# Altium PCB Board1V2.PcbDoc
Units mil, origin at the board's own origin, x right, y up, seen from the top; angles counter-clockwise.
Board outline 3465 x 3690 mil, 2 copper layers (Top Layer, Bottom Layer); 49 components, 29 nets, 284 pads, 66 vias.
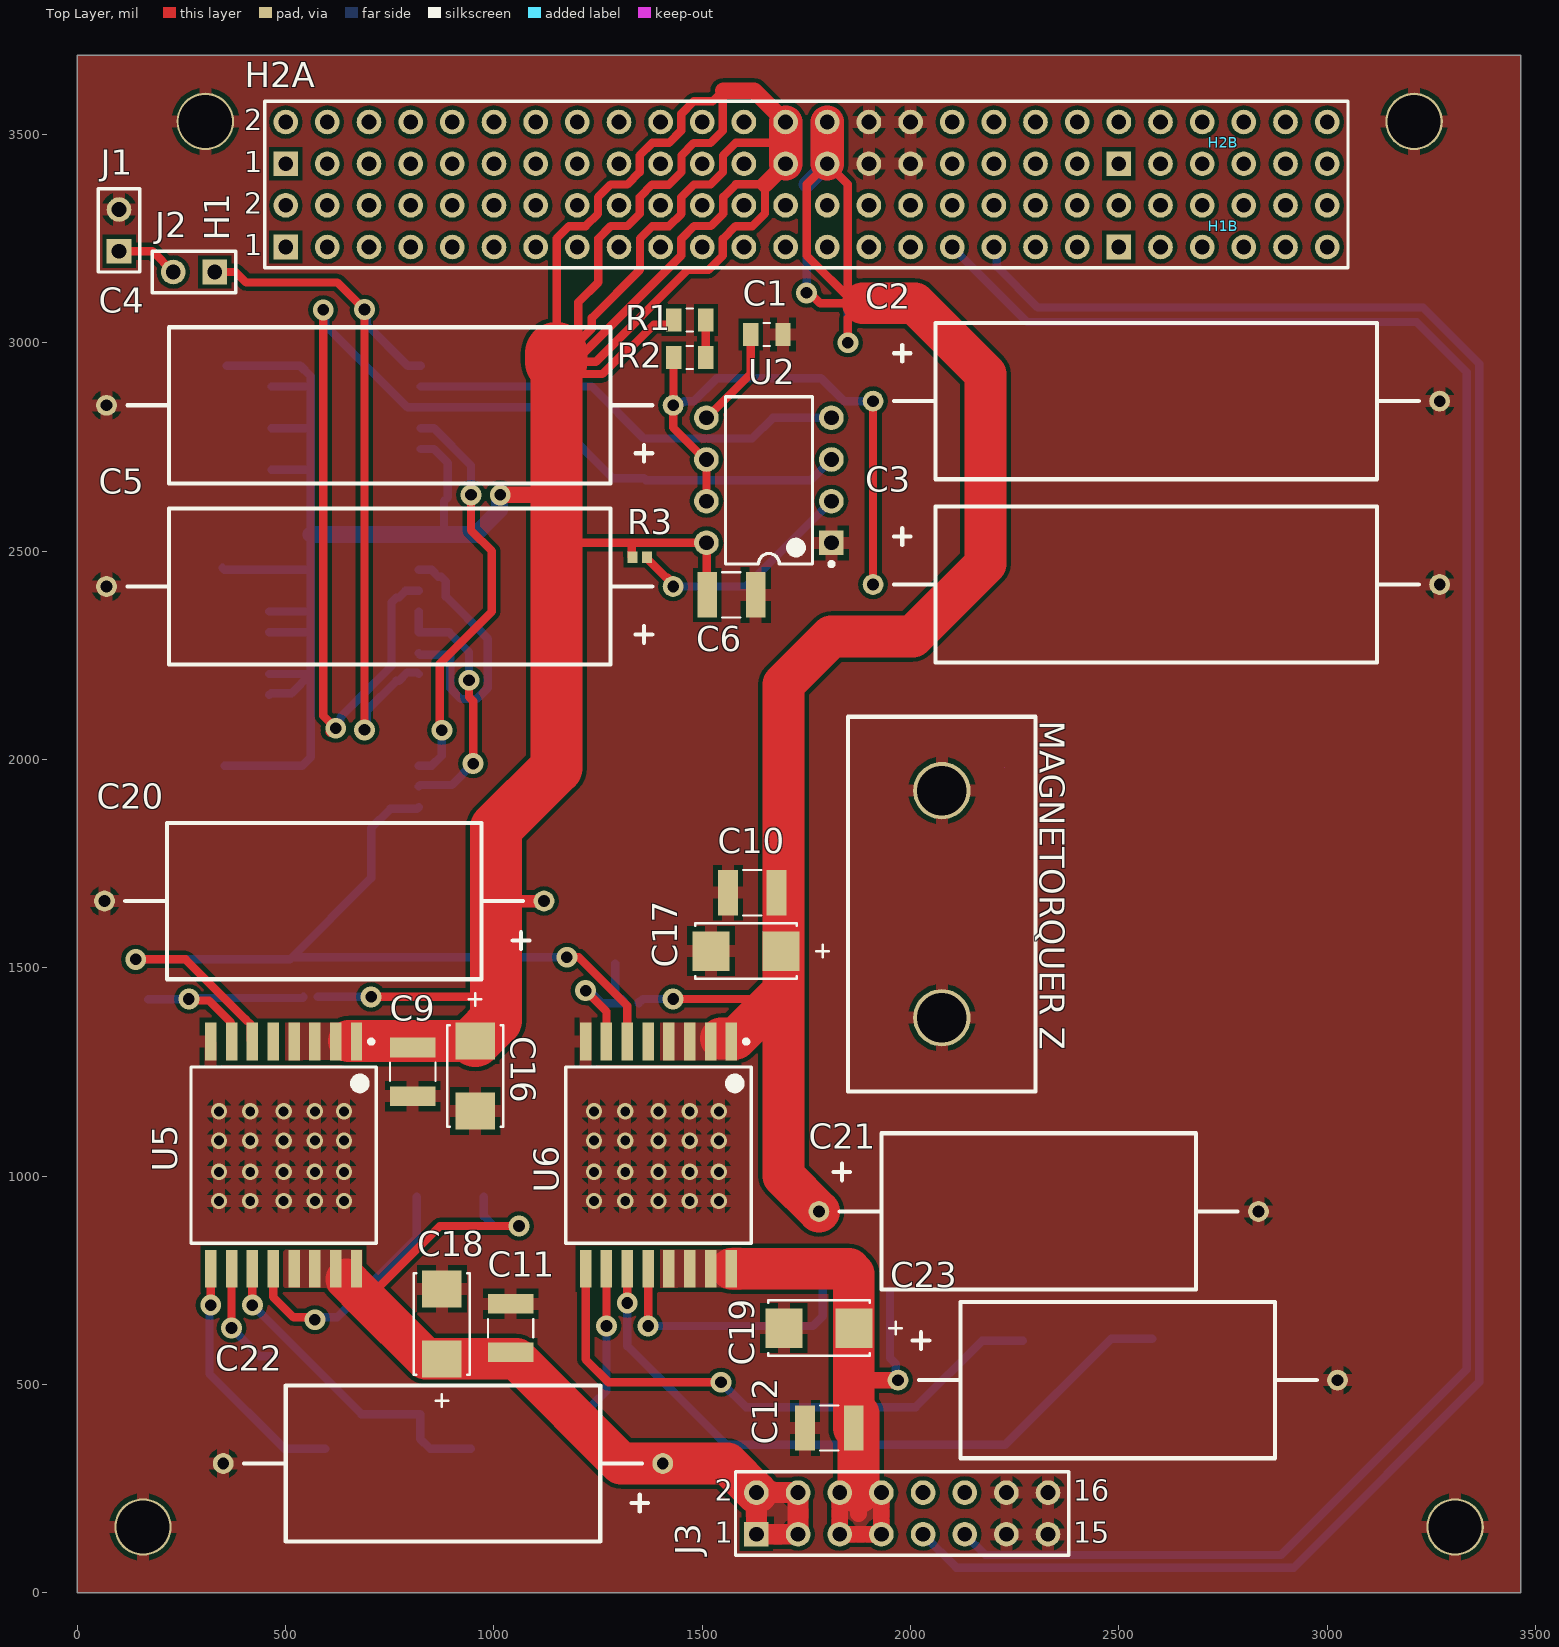
[diagram p0: Top Layer view]
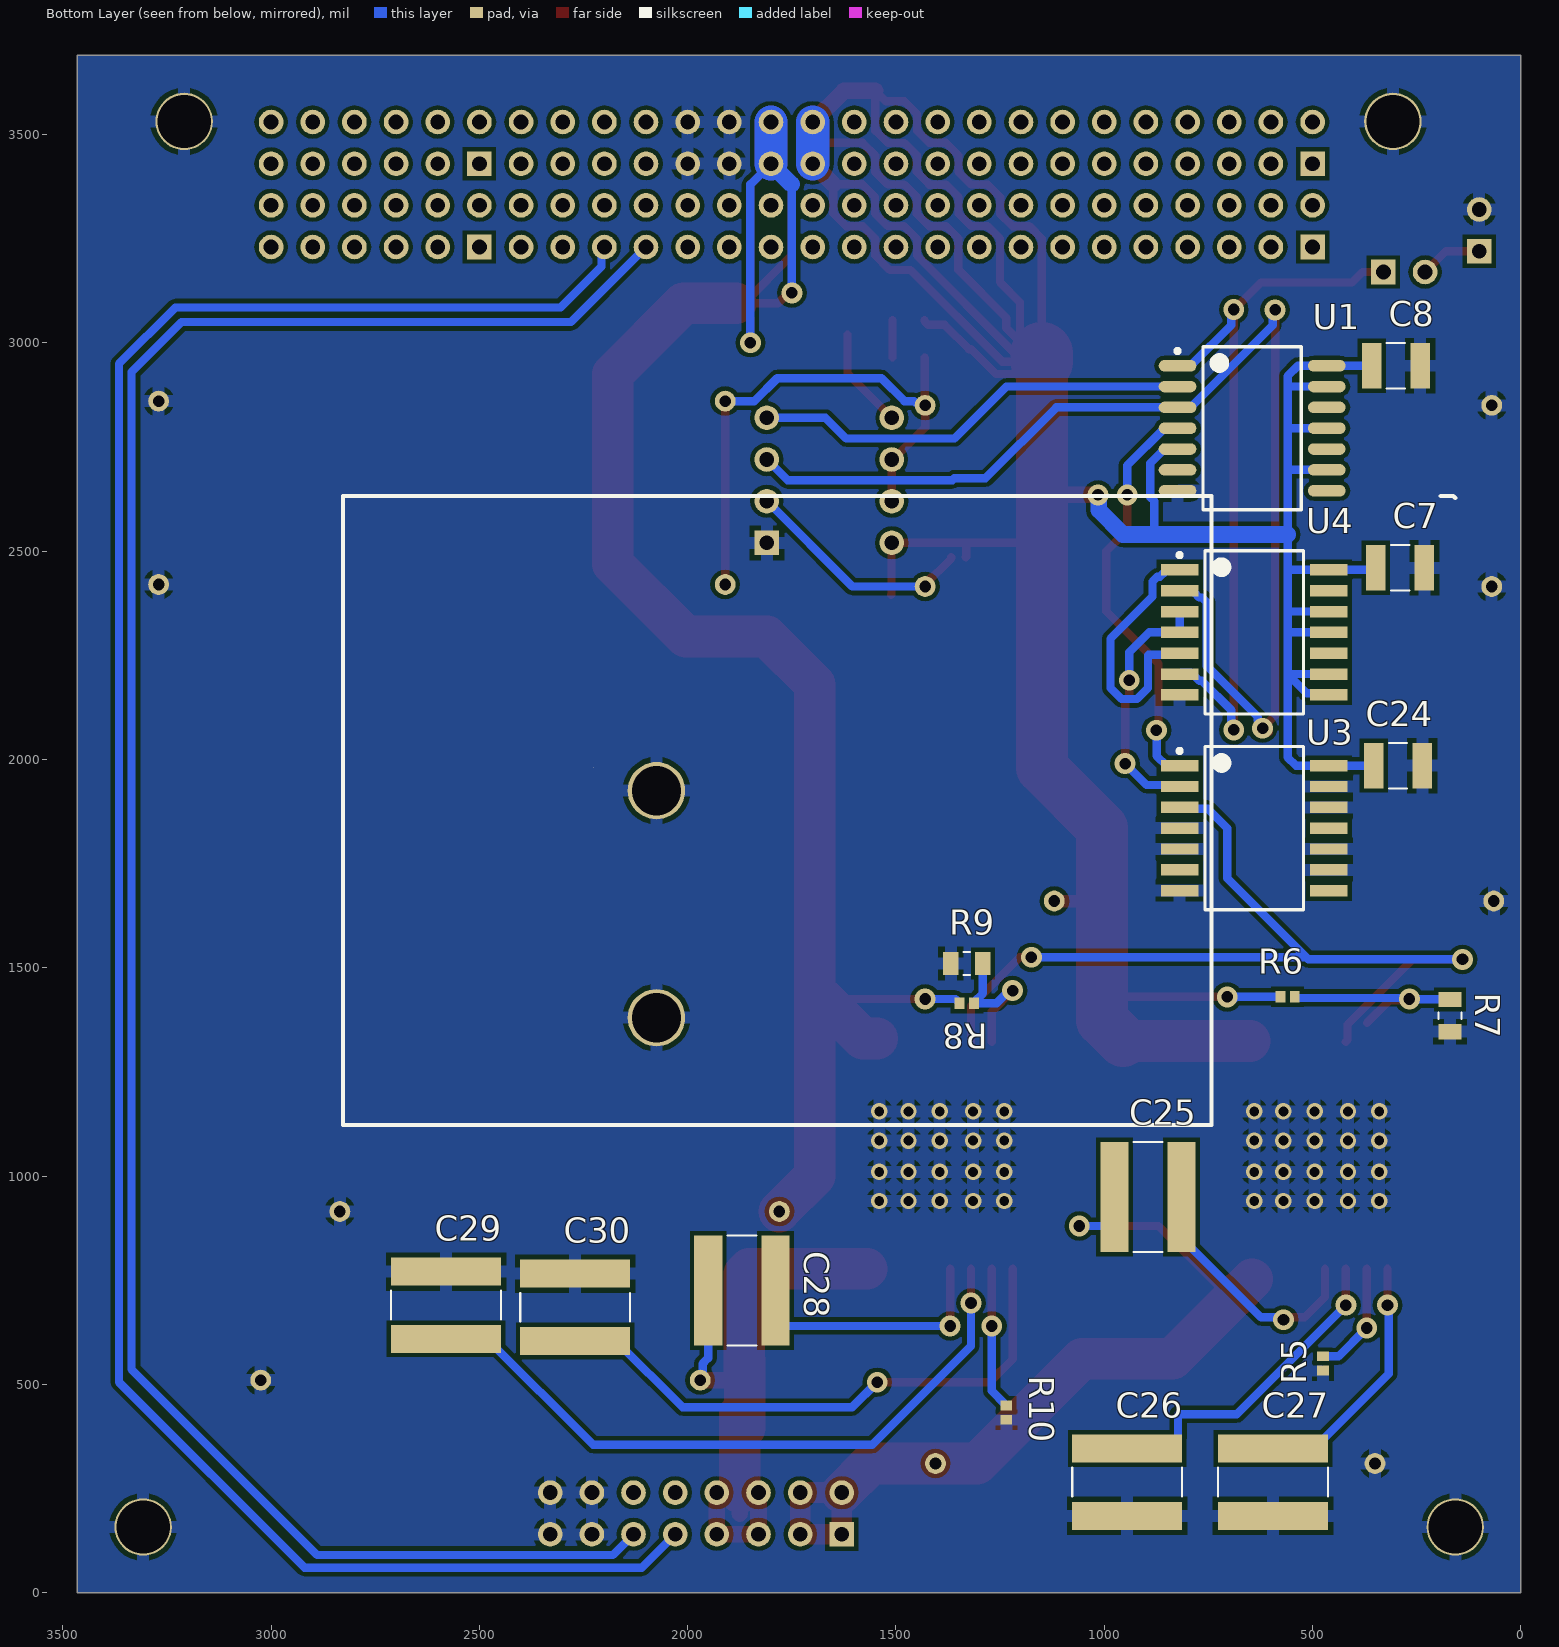
[diagram p1: Bottom Layer view, seen from below]

## Layer stack, top to bottom
Top Solder: solder mask 0.4, Solder Resist, Dk 3.5
Top Layer: signal copper 1.4
Dielectric 1: dielectric 12.6, FR-4, Dk 4.8
Bottom Layer: signal copper 1.4
Bottom Solder: solder mask 0.4, Solder Resist, Dk 3.5

## Board outline
0,0 3465,0 3465,3690 0,3690
cut-out: 2225,1980

## Design rules (kind name [scope] priority, off if disabled: settings)
Clearance Clearance_7 [InNamedPolygon('5vload')] p1: gap=10 ignorepadtopadclearanceinfootprint=FALSE except(0: Arc-Hole Track-Hole SMDPad-Hole THPad-Hole Via-Hole Fill-Hole Poly-Hole Region-Hole Text-Hole)
Clearance Clearance_6 [InNamedPolygon('5vload')] p2: gap=5 ignorepadtopadclearanceinfootprint=FALSE
Clearance Clearance_5 [InNamedPolygon('5vload')] p3: gap=10 ignorepadtopadclearanceinfootprint=TRUE
Clearance Clearance_4 [InNamedPolygon('5vload')] p4: gap=0 ignorepadtopadclearanceinfootprint=FALSE
Clearance Clearance_3 [InNamedPolygon('5vload')] p5: gap=10 ignorepadtopadclearanceinfootprint=FALSE except(0: Arc-Hole Track-Hole SMDPad-Hole THPad-Hole Via-Hole Fill-Hole Poly-Hole Region-Hole Text-Hole)
Clearance Clearance_2 [InNamedPolygon('5vload')] p6: gap=0 ignorepadtopadclearanceinfootprint=FALSE
Clearance Clearance_1 [InNamedPolygon('5VLOADTOP2')] p7: gap=10 ignorepadtopadclearanceinfootprint=FALSE
Clearance [All] p8: gap=10 ignorepadtopadclearanceinfootprint=FALSE except(0: Arc-Hole Track-Hole SMDPad-Hole THPad-Hole Via-Hole Fill-Hole Poly-Hole Region-Hole Text-Hole)
PolygonConnect PolygonConnect_19 [All vs IsNamedPolygon('NONET_L-01_P-001')] p1: thpad.connectstyle=Relief thpad.reliefconductorwidth=40 thpad.reliefentries=4 thpad.polygonreliefangle="90 Angle" thpad.airgapwidth=12 smdpad.connectstyle=Relief smdpad.reliefconductorwidth=10 smdpad.reliefentries=4 smdpad.polygonreliefangle="90 Angle" smdpad.airgapwidth=10 via.connectstyle=Relief via.reliefconductorwidth=10 via.reliefentries=4 via.polygonreliefangle="90 Angle" via.airgapwidth=10
PolygonConnect PolygonConnect_18 [All vs IsNamedPolygon('NONET_L-01_P-001')] p2: thpad.connectstyle=Relief thpad.reliefconductorwidth=50 thpad.reliefentries=4 thpad.polygonreliefangle="90 Angle" thpad.airgapwidth=12 smdpad.connectstyle=Relief smdpad.reliefconductorwidth=10 smdpad.reliefentries=4 smdpad.polygonreliefangle="90 Angle" smdpad.airgapwidth=10 via.connectstyle=Relief via.reliefconductorwidth=10 via.reliefentries=4 via.polygonreliefangle="90 Angle" via.airgapwidth=10
PolygonConnect PolygonConnect_17 [All vs IsNamedPolygon('NONET_L-01_P-001')] p3: connectstyle=Direct reliefconductorwidth=10 reliefentries=4 polygonreliefangle="90 Angle" airgapwidth=10
PolygonConnect PolygonConnect_16 [All vs IsNamedPolygon('NONET_L-01_P-001')] p4: thpad.connectstyle=Relief thpad.reliefconductorwidth=40 thpad.reliefentries=4 thpad.polygonreliefangle="90 Angle" thpad.airgapwidth=12 smdpad.connectstyle=Relief smdpad.reliefconductorwidth=10 smdpad.reliefentries=4 smdpad.polygonreliefangle="90 Angle" smdpad.airgapwidth=10 via.connectstyle=Relief via.reliefconductorwidth=10 via.reliefentries=4 via.polygonreliefangle="90 Angle" via.airgapwidth=10
PolygonConnect PolygonConnect_15 [All vs IsNamedPolygon('5vload')] p5: thpad.connectstyle=Relief thpad.reliefconductorwidth=40 thpad.reliefentries=4 thpad.polygonreliefangle="90 Angle" thpad.airgapwidth=12 smdpad.connectstyle=Relief smdpad.reliefconductorwidth=10 smdpad.reliefentries=4 smdpad.polygonreliefangle="90 Angle" smdpad.airgapwidth=10 via.connectstyle=Relief via.reliefconductorwidth=10 via.reliefentries=4 via.polygonreliefangle="90 Angle" via.airgapwidth=10
PolygonConnect PolygonConnect_14 [All vs IsNamedPolygon('5vload')] p6: connectstyle=Relief reliefconductorwidth=49 reliefentries=4 polygonreliefangle="90 Angle" airgapwidth=12
PolygonConnect PolygonConnect_13 [All vs IsNamedPolygon('5VLOADTOP2')] p7: connectstyle=Relief reliefconductorwidth=40 reliefentries=4 polygonreliefangle="90 Angle" airgapwidth=12
PolygonConnect PolygonConnect_12 [All vs IsNamedPolygon('5VLOADTOP2')] p8: thpad.connectstyle=Relief thpad.reliefconductorwidth=40 thpad.reliefentries=4 thpad.polygonreliefangle="90 Angle" thpad.airgapwidth=12 smdpad.connectstyle=Relief smdpad.reliefconductorwidth=10 smdpad.reliefentries=4 smdpad.polygonreliefangle="90 Angle" smdpad.airgapwidth=10 via.connectstyle=Relief via.reliefconductorwidth=10 via.reliefentries=4 via.polygonreliefangle="90 Angle" via.airgapwidth=10
PolygonConnect PolygonConnect_11 [All vs IsNamedPolygon('GNDBOT')] p9: connectstyle=Relief reliefconductorwidth=30 reliefentries=4 polygonreliefangle="90 Angle" airgapwidth=12
PolygonConnect PolygonConnect_10 [All vs IsNamedPolygon('3V3LOADTOP')] p10: thpad.connectstyle=Relief thpad.reliefconductorwidth=10 thpad.reliefentries=4 thpad.polygonreliefangle="90 Angle" thpad.airgapwidth=10 smdpad.connectstyle=Direct smdpad.reliefconductorwidth=10 smdpad.reliefentries=4 smdpad.polygonreliefangle="90 Angle" smdpad.airgapwidth=10 via.connectstyle=Relief via.reliefconductorwidth=10 via.reliefentries=4 via.polygonreliefangle="90 Angle" via.airgapwidth=10
PolygonConnect PolygonConnect_9 [All vs IsNamedPolygon('3V3TPOP')] p11: thpad.connectstyle=Relief thpad.reliefconductorwidth=10 thpad.reliefentries=4 thpad.polygonreliefangle="90 Angle" thpad.airgapwidth=10 smdpad.connectstyle=Direct smdpad.reliefconductorwidth=10 smdpad.reliefentries=4 smdpad.polygonreliefangle="90 Angle" smdpad.airgapwidth=10 via.connectstyle=Relief via.reliefconductorwidth=10 via.reliefentries=4 via.polygonreliefangle="90 Angle" via.airgapwidth=10
PolygonConnect PolygonConnect_8 [All vs IsNamedPolygon('5VLOADTOP')] p12: thpad.connectstyle=Relief thpad.reliefconductorwidth=10 thpad.reliefentries=4 thpad.polygonreliefangle="90 Angle" thpad.airgapwidth=10 smdpad.connectstyle=Direct smdpad.reliefconductorwidth=10 smdpad.reliefentries=4 smdpad.polygonreliefangle="90 Angle" smdpad.airgapwidth=10 via.connectstyle=Relief via.reliefconductorwidth=10 via.reliefentries=4 via.polygonreliefangle="90 Angle" via.airgapwidth=10
PolygonConnect PolygonConnect_7 [All vs IsNamedPolygon('5VLOADTOP')] p13: thpad.connectstyle=Relief thpad.reliefconductorwidth=10 thpad.reliefentries=4 thpad.polygonreliefangle="90 Angle" thpad.airgapwidth=10 smdpad.connectstyle=Direct smdpad.reliefconductorwidth=10 smdpad.reliefentries=4 smdpad.polygonreliefangle="90 Angle" smdpad.airgapwidth=10 via.connectstyle=Relief via.reliefconductorwidth=10 via.reliefentries=4 via.polygonreliefangle="90 Angle" via.airgapwidth=10
PolygonConnect PolygonConnect_6 [All vs IsNamedPolygon('5VTOP1')] p14: thpad.connectstyle=Relief thpad.reliefconductorwidth=10 thpad.reliefentries=4 thpad.polygonreliefangle="90 Angle" thpad.airgapwidth=10 smdpad.connectstyle=Direct smdpad.reliefconductorwidth=10 smdpad.reliefentries=4 smdpad.polygonreliefangle="90 Angle" smdpad.airgapwidth=10 via.connectstyle=Relief via.reliefconductorwidth=10 via.reliefentries=4 via.polygonreliefangle="90 Angle" via.airgapwidth=10
PolygonConnect PolygonConnect_5 [All vs IsNamedPolygon('GNDTOP')] p15: connectstyle=Relief reliefconductorwidth=30 reliefentries=4 polygonreliefangle="90 Angle" airgapwidth=12
PolygonConnect PolygonConnect_4 [All vs IsNamedPolygon('5VLOADTOP')] p16: thpad.connectstyle=Relief thpad.reliefconductorwidth=10 thpad.reliefentries=4 thpad.polygonreliefangle="90 Angle" thpad.airgapwidth=10 smdpad.connectstyle=Direct smdpad.reliefconductorwidth=10 smdpad.reliefentries=4 smdpad.polygonreliefangle="90 Angle" smdpad.airgapwidth=10 via.connectstyle=Relief via.reliefconductorwidth=10 via.reliefentries=4 via.polygonreliefangle="90 Angle" via.airgapwidth=10
PolygonConnect PolygonConnect_3 [All vs IsNamedPolygon('5VLOADTOP')] p17: connectstyle=Relief reliefconductorwidth=30 reliefentries=4 polygonreliefangle="90 Angle" airgapwidth=12
PolygonConnect PolygonConnect_2 [All vs IsNamedPolygon('5VLOADTOP')] p18: connectstyle=Relief reliefconductorwidth=30 reliefentries=4 polygonreliefangle="90 Angle" airgapwidth=12
PolygonConnect PolygonConnect_1 [All vs IsNamedPolygon('5VLOADTOP')] p19: thpad.connectstyle=Relief thpad.reliefconductorwidth=30 thpad.reliefentries=4 thpad.polygonreliefangle="90 Angle" thpad.airgapwidth=10 smdpad.connectstyle=Relief smdpad.reliefconductorwidth=10 smdpad.reliefentries=4 smdpad.polygonreliefangle="90 Angle" smdpad.airgapwidth=10 via.connectstyle=Relief via.reliefconductorwidth=10 via.reliefentries=4 via.polygonreliefangle="90 Angle" via.airgapwidth=10
PolygonConnect [All] p20: connectstyle=Relief reliefconductorwidth=10 reliefentries=4 polygonreliefangle="90 Angle" airgapwidth=10
RoutingVias [All] p1: holewidth=28 width=50 viastyle="Through Hole" minholewidth=28 minwidth=50 maxholewidth=28 maxwidth=50
SolderMaskExpansion [All] p1: expansion=4
Width [All] p1: maxlimit=200 minlimit=10 preferedwidth=10 minimp=50.000000 maximp=50.000000 favimp=50.000000
30 further rules are at their usual default settings.

## Components (designator, comment, footprint, x,y, rotation, side; value= is the part's Value field where it differs from the comment)
C1 "CDR31BX103AKUS" *RESC2012X64N 1655,3020 r0 top value=0.01uF
C2 "M39006/25-0104" M39006/25-0104 1910,2860 r0 top value=1800uF
C3 "M39006/25-0104" M39006/25-0104 1910,2420 r0 top value=1800uF
C4 "M39006/25-0104" M39006/25-0104 1430,2850 r180 top value=1800uF
C5 "M39006/25-0104" M39006/25-0104 1430,2415 r180 top value=1800uF
C6 "CDR33BX104AKWSAT" *CAPC3225X125N 1570,2395 r0 top value=0.1uF
C7 "CDR33BX104AKWSAT" *CAPC3225X125N 290,2460 r0 bottom value=0.1uF
C8 "CDR33BX104AKWSAT" *CAPC3225X125N 300,2945 r0 bottom value=0.1uF
C9 "CDR33BX104AKWSAT" *CAPC3225X125N 805,1250 r270 top value=0.1uF
C10 "CDR33BX104AKWSAT" *CAPC3225X125N 1620,1680 r180 top value=0.1uF
C11 "CDR33BX104AKWSAT" *CAPC3225X125N 1040,635 r90 top value=0.1uF
C12 "CDR33BX104AKWSAT" *CAPC3225X125N 1805,395 r180 top value=0.1uF
C16 "CWR11HH106KD" *CAPCP6032X280N 955,1240 r270 top value=10uF
C17 "CWR11HH106KD" *CAPCP6032X280N 1605,1540 r180 top value=10uF
C18 "CWR11HH106KD" *CAPCP6032X280N 875,645 r90 top value=10uF
C19 "CWR11HH106KD" *CAPCP6032X280N 1780,635 r180 top value=10uF
C20 "M39006/22-0457" M39006/22-0457 1120,1660 r180 top value=560uF
C21 "M39006/22-0457" M39006/22-0457 1780,915 r0 top value=560uF
C22 "M39006/22-0457" M39006/22-0457 1405,310 r180 top value=560uF
C23 "M39006/22-0457" M39006/22-0457 1970,510 r0 top value=560uF
C24 "CDR33BX104AKWSAT" *CAPC3225X125N 295,1985 r180 bottom value=0.1uF
C25 "CDR35BX224AKZS7185" *CAPC4663X340N 895,950 r180 bottom value=0.22uF
C26 "CDR35BX224AKZS7185" *CAPC4663X340N 945,265 r270 bottom value=0.22uF
C27 "CDR35BX224AKZS7185" *CAPC4663X340N 595,265 r270 bottom value=0.22uF
C28 "CDR35BX224AKZS7185" *CAPC4663X340N 1870,725 r180 bottom value=0.22uF
C29 "CDR35BX224AKZS7185" *CAPC4663X340N 2580,690 r90 bottom value=0.22uF
C30 "CDR35BX224AKZS7185" *CAPC4663X340N 2270,685 r90 bottom value=0.22uF
H1 "Header 20X2" HDR2X20 500,3230 r0 top (schematic designator H1A)
H1B "Header 6X2" HDR2X6 2500,3230 r0 top
H2A "Header 20X2" HDR2X20 500,3430 r0 top
H2B "Header 6X2" HDR2X6 2500,3430 r0 top
J1 "Switch 1" HDR1X2 100,3220 r90 top
J2 "Switch 2" HDR1X2 330,3170 r180 top
J3 "Header 8X2" HDR2X8 1630,140 r0 top
R1 "M55342K06B150ERS3" *RESC2012X64N 1470,3055 r180 top value=150K
R2 "M55342K06B200ERS3" *RESC2012X64N 1470,2965 r0 top value=200K
R3 "M55342E11B100BRT5" *RESC1005X84N 1350,2485 r180 top value=100K
R5 "M55342K11B10E0RS3" *RESC1005X84N 475,550 r270 bottom value=10K
R6 "M55342E11B100BRT5" *RESC1005X84N 560,1430 r0 bottom value=100K
R7 "M55342E06B13B3RT5" *RESC2012X64N 170,1385 r90 bottom value=13.3K
R8 "M55342E11B100BRT5" *RESC1005X84N 1330,1415 r0 bottom value=100K
R9 "M55342E06B20B0RT5" *RESC2012X64N 1330,1510 r180 bottom value=20K
R10 "M55342K11B10E0RS3" *RESC1005X84N 1235,432.2 r270 bottom value=10K
U1 "SN54LS14-SP" SN54LS14-SP 645,2795 r180 bottom
U2 "SE555-SP" P0008A 1660,2670 r180 top
U3 "SN54LS08-SP" SN54LS08-SP 640,1835 r180 bottom
U4 "SN54LS02-SP" SN54LS02-SP 640,2305 r180 bottom
U5 "TPS7H2201-SP" TPS7H2201-SP 495,1050 r270 top
U6 "TPS7H2201-SP" TPS7H2201-SP 1395,1050 r270 top

## Footprints (in the part's own frame and the unit in brackets; to place one, negate y for a bottom-side part, rotate by r counter-clockwise, add the part's x,y. Pads: shape width x height; smd on the part's side, far side on the other; paste and mask are expansions set on the pad)
*CAPC3225X125N [mm]
  rect 1.2x2.76 smd: 1(-1.481,0) 2(1.481,0)
  silkscreen extent -0.56,-1.38 0.56,1.38
*CAPC4663X340N [mm]
  rect 1.71x6.71 smd: 1(-2.05,0) 2(2.05,0)
  silkscreen extent -0.88,-3.35 0.88,3.35
*CAPCP6032X280N [mil]
  rect 89x95 smd: 1(-84,0) 2(84,0)
  silkscreen extent -199,-67 122,67
*RESC1005X84N [mm]
  rect 0.6x0.71 smd: 1(-0.437,0) 2(0.437,0)
*RESC2012X64N [mm]
  rect 0.93x1.42 smd: 1(-0.979,0) 2(0.979,0)
  silkscreen extent -0.2,-0.7 0.2,0.7
HDR1X2 [mm] "Connector; Header; 2 Position"
  rect 1.5x1.5 hole 0.9: 1(0,0)
  round 1.5 hole 0.9: 2(2.54,0)
  silkscreen extent -1.27,-1.27 3.81,1.27
HDR2X6 [mm] "Connector; Header; 6x2 Position"
  rect 1.5x1.5 hole 0.9: 1(0,0)
  round 1.5 hole 0.9: 2(0,2.54) 3(2.54,0) 4(2.54,2.54) 5(5.08,0) 6(5.08,2.54) 7(7.62,0) 8(7.62,2.54) 9(10.16,0) 10(10.16,2.54) 11(12.7,0) 12(12.7,2.54)
  silkscreen extent -1.27,-1.27 13.97,3.81
HDR2X8 [mm] "Connector; Header; 8x2 Position"
  rect 1.5x1.5 hole 0.9: 1(0,0)
  round 1.5 hole 0.9: 2(0,2.54) 3(2.54,0) 4(2.54,2.54) 5(5.08,0) 6(5.08,2.54) 7(7.62,0) 8(7.62,2.54) 9(10.16,0) 10(10.16,2.54) 11(12.7,0) 12(12.7,2.54) 13(15.24,0) 14(15.24,2.54) 15(17.78,0) 16(17.78,2.54)
  silkscreen extent -1.27,-1.27 19.05,3.81
HDR2X20 [mm] "Connector; Header; 20x2 Position"
  rect 1.5x1.5 hole 0.9: 1(0,0)
  round 1.5 hole 0.9: 2(0,2.54) 3(2.54,0) 4(2.54,2.54) 5(5.08,0) 6(5.08,2.54) 7(7.62,0) 8(7.62,2.54) 9(10.16,0) 10(10.16,2.54) 11(12.7,0) 12(12.7,2.54) 13(15.24,0) 14(15.24,2.54) 15(17.78,0) 16(17.78,2.54) 17(20.32,0) 18(20.32,2.54) 19(22.86,0) 20(22.86,2.54) 21(25.4,0) 22(25.4,2.54) 23(27.94,0) 24(27.94,2.54) 25(30.48,0) 26(30.48,2.54) 27(33.02,0) 28(33.02,2.54) 29(35.56,0) 30(35.56,2.54) 31(38.1,0) 32(38.1,2.54) 33(40.64,0) 34(40.64,2.54) 35(43.18,0) 36(43.18,2.54) 37(45.72,0) 38(45.72,2.54) 39(48.26,0) 40(48.26,2.54)
  silkscreen extent -1.27,-1.27 49.53,3.81
M39006/22-0457 [mil]
  round 50 hole 28: 1(0,0) 2(1055,0)
  silkscreen extent 35,-187 1005,188
M39006/25-0104 [mil]
  round 50 hole 28: 1(0,0) 2(1360,0)
  silkscreen extent 50,-188 1310,188
P0008A [mm] "DIP, 8-Leads, Body 10.15x6.6mm, Pitch 2.54mm"
  rect 1.5x1.5 hole 0.9: 1(-3.81,3.81)
  round 1.5 hole 0.9: 2(-3.81,1.27) 3(-3.81,-1.27) 4(-3.81,-3.81) 5(3.81,-3.81) 6(3.81,-1.27) 7(3.81,1.27) 8(3.81,3.81)
  silkscreen extent -3.94,-5.1 2.65,5.23, body extent -3.95,-5.07 3.95,5.07, height 5.08
SN54LS02-SP [mm] "NOR gate"
  rect 2.3x0.7 smd: 1(-4.55,3.81) 2(-4.55,2.54) 3(-4.55,1.27) 4(-4.55,0) 5(-4.55,-1.27) 6(-4.55,-2.54) 7(-4.55,-3.81) 8(4.55,-3.81) 9(4.55,-2.54) 10(4.55,-1.27) 11(4.55,0) 12(4.55,1.27) 13(4.55,2.54) 14(4.55,3.81)
  silkscreen extent -4.68,-4.97 3,4.97, body extent -5.29,-4.96 5.29,4.96, height 2.03
SN54LS08-SP [mm]
  rect 2.3x0.7 smd: 1(-4.55,3.81) 2(-4.55,2.54) 3(-4.55,1.27) 4(-4.55,0) 5(-4.55,-1.27) 6(-4.55,-2.54) 7(-4.55,-3.81) 8(4.55,-3.81) 9(4.55,-2.54) 10(4.55,-1.27) 11(4.55,0) 12(4.55,1.27) 13(4.55,2.54) 14(4.55,3.81)
  silkscreen extent -4.68,-4.97 3,4.97, body extent -3.3,-4.95 3.3,4.95, height 2.03
SN54LS14-SP [mm] "CFP, 14-Leads, Body 9.91x6.60mm (max), Pitch 1.27mm, IPC Medium Density"
  oval 2.3x0.7 smd: 1(-4.55,3.81) 2(-4.55,2.54) 3(-4.55,1.27) 4(-4.55,0) 5(-4.55,-1.27) 6(-4.55,-2.54) 7(-4.55,-3.81) 8(4.55,-3.81) 9(4.55,-2.54) 10(4.55,-1.27) 11(4.55,0) 12(4.55,1.27) 13(4.55,2.54) 14(4.55,3.81)
  silkscreen extent -4.68,-4.97 3,4.97, body extent -3.3,-4.95 3.3,4.95, height 2.03
TPS7H2201-SP [mm]
  rect 2.3x0.7 smd: 1(-6.925,4.445) 2(-6.925,3.175) 3(-6.925,1.905) 4(-6.925,0.635) 5(-6.925,-0.635) 6(-6.925,-1.905) 7(-6.925,-3.175) 8(-6.925,-4.445) 9(6.925,-4.445) 10(6.925,-3.175) 11(6.925,-1.905) 12(6.925,-0.635) 13(6.925,0.635) 14(6.925,1.905) 15(6.925,3.175) 16(6.925,4.445)
  silkscreen extent -7.05,-5.65 5.38,5.65, body extent -4.94,-5.63 4.94,5.63, height 2.34

## Part data
C1: "0.01uF"
C2 C3 C4 C5: "1800uF"
C6 C7 C8 C9 C10 C11 C12 C24: "0.1uF"
C16 C17 C18 C19: "10uF"
C20 C21 C22 C23: "560uF"
C25 C26 C27 C28 C29 C30: "0.22uF"
H1 H2A: "Header, 20-Pin, Dual row", LatestRevisionDate=17-Jul-2002, LatestRevisionNote="Re-released for DXP Platform.", Publisher="Altium Limited"
H1B H2B: "Header, 6-Pin, Dual row", LatestRevisionDate=17-Jul-2002, LatestRevisionNote="Re-released for DXP Platform.", Publisher="Altium Limited"
J1 J2: library part "Header 2", "Header, 2-Pin", LatestRevisionDate=17-Jul-2002, LatestRevisionNote="Re-released for DXP Platform.", Publisher="Altium Limited"
J3: "Header, 8-Pin, Dual row", LatestRevisionDate=17-Jul-2002, LatestRevisionNote="Re-released for DXP Platform.", Publisher="Altium Limited"
R1: "150K"
R2: "200K"
R3 R6 R8: "100K"
R5 R10: "10K"
R7: "13.3K"
R9: "20K"
U1: "Invertor"
U2: library part CMP-2000-04954-1, "Precision Timer, 4.5 to 16 V, -55 to 125 degC, 8-Pin DIP, Pb-Free, Tube", Manufacturer=TexasInstruments, Maximum High Level Output Current=-200mA, Maximum Low Level Output Current=200mA, Operating Supply Voltage=5, Package=8PDIP, Package Description="8-Pin Double In-line Package, Body 9.59 x 6.35 mm, Pitch 2.54 mm", Package Reference=P8, Category=Timer, Datasheet URL=http://www.ti.com/general/docs/lit/getliterature.tsp?genericPartNumber=NE555&fileType=pdf, Datasheet Version="Rev. I, 09/2014", Manufacturer URL=http://www.ti.com/, Number of Internal Timers=1, Package URL=http://www.ti.com/lit/ml/mpdi001b/mpdi001b.pdf, Packaging=Rail/Tube, Rad Hard=No, Type=Standard
U3: "AND gate"
U4: "NOR gate"

## Free pads (board coordinates)
  round 137.79 hole 127.95: 1(307.09,3531.5) 2(3208.66,3531.5) 3(3307.09,157.48) 4(157.48,157.48)
  round 137.8 hole 118.11: 5(2075,1925) 6(2075,1380)

## Via types
v1: diameter 39.37, hole 23.62, Top Layer to Bottom Layer, 40 vias
v2: diameter 50, hole 28, Top Layer to Bottom Layer, 26 vias

## Nets (pads, with @x,y where several pads share a name; then routed paths per layer and width w, separated by ;. In a path a pad name is that pad's centre, name@x,y a point inside that pad or via, vN(x,y) a via of type N, cw(c..) or ccw(c..) an arc to the next point about the centre after c; other vN are vias at no path point)
3V3: C10.1 C17.1 C21.1 H2A.27 H2A.28 R8.2 U6.1 U6.2 U6.3 U6.4 | length 5265.7
  Top Layer w20: v2(1430,1425) 1675,1425 1695,1445 ; v2(1750,3120) 1758.12,3120 1783.12,3095 1864.96,3095 ; v2(1849.53,3000.17) 1849.53,3059.53 1885,3095 ; 1864.96,3095 1885,3095 ; 1864.96,3095 1750.47,3209.49 1750.47,3380.47 H2A.27 1849.53,3380.47 1849.53,3130.47 1885,3095
  Top Layer w80: H2A.27 H2A.28
  Top Layer w100: 1545,1330 1580,1330 1675,1425 ; C21.1 1695,1000 1695,1445 1695,2180 1810,2295 2005,2295 2180,2470 2180,2925 2010,3095 1885,3095
  Bottom Layer w20: R8.2 1347.2,1417.17 1349.02,1418.98 1351.18,1418.98 1357.2,1425 v2(1430,1425) ; v2(1750,3120) 1750.47,3120.47 1750.47,3380.47 ; H2A.27 1849.53,3380.47 v2(1849.53,3000.17)
  Bottom Layer w40: 1750.47,3380.47 H2A.27
  Bottom Layer w80: H2A.27 H2A.28
3V3LOAD: C12.1 C19.1 C23.1 C28.1 J3.5 J3.6 J3.7 J3.8 U6.13 U6.14 U6.15 U6.16 | length 1910.1
  Top Layer w20: C12.1@1864,440.02 1875,429.02 1878.31,425.71 C12.1@1878.31,395
  Top Layer w40: 1864,221 1864,240 ; C12.1@1864,440.02 1864,500 ; 1875,190 1875,240 ; C12.1@1875,429.02 1875,489 1864,500 ; C23.1 1874,510 1864,500 ; 1864,240 J3.6 J3.5 J3.7 J3.8 1875,240 ; 1864,240 1875,240
  Top Layer w100: U6.16 1852.28,777.36 1864,765.65 C19.1 1864,560 ; C12.1 1863.31,559.31 1864,560 ; 1864,500 1864,560 ; 1875,240 C12.1@1875,429.02
  Bottom Layer w20: C28.1 1950.71,562.91 1964.26,549.36 1964.26,515.74 C23.1
  Bottom Layer w40: C23.1 C23.1@1970,512.71
5V: C6.1 C7.2 C8.2 C9.1 C16.1 C20.1 C24.1 H2A.25 H2A.26 R1.2 R3.2 R6.2 U1.5 U1.9 U1.11 U1.13 U1.14 U2.8 U3.14 U4.8 U4.9 U4.11 U4.12 U4.14 U5.1 U5.2 U5.3 U5.4 | length 11236.2
  Top Layer w20: v2(705,1430) 949,1430 1005,1374 ; 1150,2975 1150.47,2975.47 ; 1155,2530 1150,2525 1160,2515 ; 1190,2485 1160,2515 ; 1194.61,2910 1179.61,2925 ; 1215.04,2975 1449.53,3209.49 1449.53,3249.57 1480.43,3280.47 1520.51,3280.47 1550.47,3310.43 1550.47,3350.51 1580.43,3380.47 1650.47,3380.47 1650.47,3310.43 1620.04,3280 1579.96,3280 1549.53,3249.57 1549.53,3209.49 1515.04,3175 1465,3175 1244.61,2954.61 1154.61,2954.61 ; R3.2 1330.98,2486.81 1330.98,2514.02 1325,2520 ; R1.2 1431.46,3051.46 1423.15,3043.15 1383.15,3043.15 1325,2985 1320,2985 1260,2925 1179.61,2925 ; C6.1 1510.85,2395.85 1510.85,2519.15 U2.8 1325,2520 ; 1550,3605 1549.53,3604.53 ; 1700,3480 1579.96,3480 1549.76,3449.81 1549.76,3409.72 1520.16,3380.12 1480.08,3380.12 1449.82,3349.87 1449.82,3309.78 1420.19,3280.15 1380.1,3280.15 1350.47,3250.51 1350.47,3175.47 1235,3060 1235,3035 1154.61,2954.61 ; 1150.47,2975.47 1150.47,3250.51 1180.1,3280.15 1220.19,3280.15 1249.82,3309.78 1249.82,3349.87 1280.08,3380.12 1320.16,3380.12 1349.76,3409.72 1349.76,3449.81 1379.96,3480 1420.04,3480 1449.53,3509.49 1449.53,3549.57 1479.48,3579.53 1524.53,3579.53 1549.53,3604.53 ; 1150.47,2975.47 1202.2,3027.2 1202.2,3097.2 1250.47,3145.47 1250.47,3250.51 1280.25,3280.3 1320.34,3280.3 1350.12,3310.08 1350.12,3350.16 1379.72,3379.76 1419.81,3379.76 1450,3409.96 1450,3450.04 1479.48,3479.53 1519.57,3479.53 1549.53,3509.49 1549.53,3604.53 ; 1154.61,2954.61 1150,2954.61 1179.61,2925 ; 1160,2515 1165,2520 1325,2520
  Top Layer w30: 1005,1670 1015,1660 C20.1 ; 1005,1750 1010,1755
  Top Layer w40: v2(1015,2635) 1145,2635 1150,2630 ; 1130,2845 1150,2845 ; 1550,3605 1625,3605 H2A.26 ; 1650.47,3380.47 H2A.25
  Top Layer w80: H2A.25 1700,3480 H2A.26
  Top Layer w100: 651,1324 C16.1
  Top Layer w125: C16.1 1005,1374 1005,1670 1005,1750 1005,1835 1150,1980 1150,2525 1150,2630 1150,2845 1150,2954.61
  Top Layer w150: 1150,2954.61 1150,2975
  Bottom Layer w20: C7.2 353.31,2455 U4.14 560,2455 ; C24.1 U3.14 540,1985 560,2005 560,2205 ; C8.2 U1.14 535,2945 560,2920 560,2895 ; U4.8 464.65,2158.78 513.78,2158.78 560,2205 ; U4.9 560,2205 ; U4.11 560,2305 ; U4.12 555,2355 560,2360 ; U1.9 560,2695 ; U1.11 555,2795 560,2800 ; U1.13 560,2895 ; R6.2 v2(705,1430) 699.26,1424.26 v2@689.3,1424.26 ; U1.5 855.63,2745 889.41,2711.22 889.41,2629.29 880,2619.88 880,2540 ; 560,2205 560,2305 ; 560,2305 560,2360 ; 560,2360 560,2455 ; 560,2455 560,2540 560,2695 ; 560,2695 560,2800 ; 560,2800 560,2895
  Bottom Layer w40: 560,2540 880,2540 955,2540 1013.09,2598.09 1013.09,2633.09 v2(1015,2635)
  Bottom Layer w80: H2A.25 H2A.26
5VLOAD: C11.1 C18.1 C22.1 C25.1 J3.1 J3.2 J3.3 J3.4 U5.13 U5.14 U5.15 U5.16 | length 2177
  Top Layer w20: 693.68,703.68 870,880 v2(1060,880)
  Top Layer w50: J3.1 J3.2 J3.4 J3.3 J3.1
  Top Layer w100: 645,752.36 693.68,703.68 836.36,561 C18.1 1054,561 1305,310 C22.1 1560,310 J3.2
  Bottom Layer w20: C25.1 975.71,903.66 999.37,880 v2(1060,880)
AND1A: U1.4 U3.1 | length 994.7
  Top Layer w20: v2(875,2070) 870,2075 870,2230 995,2355 995,2500 945,2550 v2(945,2635)
  Bottom Layer w20: U3.1 850.63,1985 874.41,2008.78 874.41,2069.41 v2(875,2070) ; U1.4 855.63,2795 945,2705.63 v2(945,2635)
AND1B: U3.2 U4.3 U4.4 | length 615.7
  Top Layer w20: v2(940,2190) 940,2150 950,2140 v2(950,1990)
  Bottom Layer w20: U3.2 822.91,1938.78 898.78,1938.78 v2(950,1990) ; U4.3 U4.4 892.33,2305 940,2257.33 v2(940,2190)
AND1Y: U3.3 U5.6 U6.6 | length 2230.5
  Top Layer w20: v2(140,1520) 259.98,1520 403.78,1376.2 416.22,1363.76 416.22,1326.42 U5.6 ; v2(1175,1525) 1203.64,1525 1320,1408.64 U6.6
  Bottom Layer w20: v2(140,1520) 510,1520 ; U3.3 815.35,1881.22 751.22,1881.22 705,1835 705,1715 510,1520 ; v2(1175,1525) 515,1525 510,1520
EPS_RX: H1.33 J3.11 | length 5163.4
  Bottom Layer w20: H1.33 2280,3050 3215,3050 3335,2930 3335,535.91 2889.57,90.47 2179.53,90.47 J3.11
EPS_TX: H1.35 J3.9 | length 5301.9
  Bottom Layer w20: J3.9 2110,60 2920,60 3365,505 3365,2950 3230,3085 2305,3085 2207.09,3182.91 2207.09,3222.91 H1.35
GND: C1.2 C2.2 C3.2 C4.2 C5.2 C6.2 C7.1 C8.1 C9.2 C10.2 C11.2 C12.2 C16.2 C17.2 C18.2 C19.2 C20.2 C21.2 C22.2 C23.2 C24.2 C26.2 C27.2 C29.2 C30.2 H2A.29 H2A.30 H2A.31 H2A.32 J1.2 J3.13 J3.14 J3.15 J3.16 pad.1 pad.2 pad.3 pad.4 pad.5 pad.6 R5.2 R7.1 R9.1 R10.2 U1.7 U2.1 U3.4 U3.5 U3.7 U3.9 U3.10 U3.12 U3.13 U4.7 U5.8 U6.8
  other v1: 340,940 415,940 495,940 570,940 640,940 1240,940 1315,940 1395,940 1470,940 1540,940 340,1010 415,1010 495,1010 570,1010 640,1010 1240,1010 1315,1010 1395,1010 1470,1010 1540,1010 340,1085 415,1085 495,1085 570,1085 640,1085 1240,1085 1315,1085 1395,1085 1470,1085 1540,1085 340,1155 415,1155 495,1155 570,1155 640,1155 1240,1155 1315,1155 1395,1155 1470,1155 1540,1155
NetC1_1: C1.1 U2.5 | length 244.1
  Top Layer w20: U2.5 1616.46,2926.46 C1.1
NetC2_1: C2.1 C3.1 C4.1 R2.1 U2.6 U2.7 | length 1350.4
  Top Layer w20: R2.1 1430.73,2964.27 1430.73,2850.73 C4.1 1430,2796.72 1506.72,2720 U2.6 U2.7 ; C3.1 C2.1
  Bottom Layer w20: C4.1 1435.74,2855.74 1452.46,2855.74 1456.72,2860 1479.96,2860 1534.96,2915 1785.04,2915 1840.04,2860 C2.1
NetC5_1: C5.1 R3.1 U2.2 | length 582.1
  Top Layer w20: R3.1 1367.2,2482.83 C5.1@1430,2420.04 ; C5.1@1417.2,2435.91 1430,2423.12 C5.1@1430,2420.04 ; C5.1 C5.1@1430,2420.04
  Bottom Layer w20: C5.1 1605,2415 U2.2
NetC25_2: C25.2 U5.12 | length 614.3
  Top Layer w20: U5.12 470,710 519.26,660.74 564.26,660.74 v2(570,655)
  Bottom Layer w20: v2(570,655) 575.74,660.74 623.46,660.74 814.29,851.57 C25.2
NetC26_1: C26.1 U5.11 | length 789.5
  Top Layer w20: v2(420,690) U5.11
  Bottom Layer w20: v2(420,690) 681.64,428.36 822.91,428.36 822.91,369.37 846.57,345.71 C26.1
NetC27_1: C27.1 U5.9 | length 605.5
  Top Layer w20: v2(320,690) U5.9
  Bottom Layer w20: v2(320,690) 317.28,687.28 317.28,525 496.57,345.71 C27.1
NetC28_2: C28.2 U6.12 | length 627.8
  Top Layer w20: v2(1370,640) U6.12
  Bottom Layer w20: v2(1370,640) 1765.63,640 1789.29,663.66 C28.2
NetC29_1: C29.1 U6.11 | length 1649
  Top Layer w20: v2(1320,695) U6.11
  Bottom Layer w20: v2(1320,695) 1320,591.72 1556.72,355 2227.28,355 2481.57,609.29 C29.1
NetC30_1: C30.1 U6.9 | length 1381
  Top Layer w20: U6.9 1220,560 1275,505 v2(1545,505)
  Bottom Layer w20: v2(1545,505) 1605,445 2012.28,445 2171.57,604.29 C30.1
NetJ1_1: J1.1 J2.2 | length 150.7
  Top Layer w20: J1.1 180,3220 J2.2
NetR1_1: R1.1 R2.2 | length 90
  Top Layer w20: R2.2 R1.1
NetR5_1: R5.1 U5.10 | length 275.4
  Top Layer w20: v2(370,635) U5.10
  Bottom Layer w20: v2(370,635) 437.8,567.2 R5.1
NetR6_1: R6.1 R7.2 U5.7 | length 507.2
  Top Layer w20: v2@271.46,1421.17 315.88,1421.17 368.78,1368.27
  Top Layer w30: v2(267.64,1425) v2@271.46,1421.17
  Bottom Layer w20: R7.2 170.73,1424.27 266.91,1424.27 v2(267.64,1425) ; v2@274.35,1425 v2(267.64,1425) ; R6.1 542.8,1429.31 540.98,1427.5 270.14,1427.5 v2(267.64,1425)
NetR8_1: R8.1 R9.2 U6.7 | length 352.1
  Top Layer w20: v2(1220,1445) 1270,1395 U6.7
  Bottom Layer w20: v2(1220,1445) 1228.12,1445 1258.12,1415 R8.1 1312.8,1417.17 1291.46,1438.5 R9.2
NetR10_1: R10.1 U6.10 | length 343.7
  Top Layer w20: v2(1270,640) U6.10
  Bottom Layer w20: R10.1 1237.17,449.41 1238.98,451.22 1238.98,453.39 1270,484.41 v2(1270,640)
NOR1A: U1.3 U2.3 U4.2 | length 2898.7
  Top Layer w20: v2(590,3079.13) 590,2105 v2(620,2075) 615,2075 v2@605,2065
  Bottom Layer w20: v2(590,3079.13) 595.74,3073.39 595.74,3041.9 792.64,2845 U1.3 1115,2845 1285,2675 1360,2675 1364.53,2670.47 1760.47,2670.47 U2.3 ; v2(620,2075) 620,2083.12 631.39,2094.51 631.39,2101.39 753.86,2223.86 753.86,2377.06 765.57,2388.78 772.14,2388.78 783.86,2400.5 783.86,2401.22 787.64,2405 U4.2
NOR1Y: U4.1 U4.5 | length 643.1
  Bottom Layer w20: U4.5 822.91,2251.22 893.78,2251.22 895,2250 895,2171.36 921.36,2145 958.64,2145 985,2171.36 985,2290 884.41,2390.59 884.41,2427.06 872.69,2438.78 866.13,2438.78 854.41,2450.5 854.41,2451.22 850.63,2455 U4.1
NOR2B: J2.1 U1.1 U4.6 | length 1829.1
  Top Layer w20: J2.1 380,3170 405,3145 624.13,3145 v2(689.13,3080) v2(689.13,2070.87) v2@690,2070
  Bottom Layer w20: v2(689.13,2070.87) 694.87,2076.61 694.87,2118.08 765.57,2188.78 771.42,2188.78 791.42,2208.78 815.35,2208.78 U4.6 ; v2(689.13,3080) 694.87,3074.26 694.87,3042.76 792.64,2945 U1.1
NOT1Y: U1.2 U2.4 | length 1058
  Bottom Layer w20: U1.2 1235,2895 1359.53,2770.47 1619.69,2770.47 1669.22,2820 U2.4
pads on no net: H1.1 H1.2 H1.3 H1.4 H1.5 H1.6 H1.7 H1.8 H1.9 H1.10 H1.11 H1.12 H1.13 H1.14 H1.15 H1.16 H1.17 H1.18 H1.19 H1.20 H1.21 H1.22 H1.23 H1.24 H1.25 H1.26 H1.27 H1.28 H1.29 H1.30 H1.31 H1.32 H1.34 H1.36 H1.37 H1.38 H1.39 H1.40 H1B.1 H1B.2 H1B.3 H1B.4 H1B.5 H1B.6 H1B.7 H1B.8 H1B.9 H1B.10 H1B.11 H1B.12 H2A.1 H2A.2 H2A.3 H2A.4 H2A.5 H2A.6 H2A.7 H2A.8 H2A.9 H2A.10 H2A.11 H2A.12 H2A.13 H2A.14 H2A.15 H2A.16 H2A.17 H2A.18 H2A.19 H2A.20 H2A.21 H2A.22 H2A.23 H2A.24 H2A.33 H2A.34 H2A.35 H2A.36 H2A.37 H2A.38 H2A.39 H2A.40 H2B.1 H2B.2 H2B.3 H2B.4 H2B.5 H2B.6 H2B.7 H2B.8 H2B.9 H2B.10 H2B.11 H2B.12 J3.10 J3.12 U1.6 U1.8 U1.10 U1.12 U3.6 U3.8 U3.11 U4.10 U4.13 U5.5 U6.5

## Polygon pours and split planes (outlines as drawn)
GND on Top Layer "GNDTOP" (solid, pour order 0): 0,0 0,3690 3465,3690 3465,0
5V on Top Layer "5VTOP1" (solid, pour order 3): 498.78,1385 693.78,1385 693.78,1267.36 498.78,1267.36
5VLOAD on Top Layer "5VLOADTOP" (solid, pour order 4): 498.78,832.64 693.78,832.64 693.78,722.09 493.78,722.09 493.78,830.2 496.22,832.64
3V3 on Top Layer "3V3TPOP" (solid, pour order 6): 1398.78,1377.91 1398.78,1267.36 1593.78,1267.36 1593.78,1377.91
3V3LOAD on Top Layer "3V3LOADTOP" (solid, pour order 7): 1398.78,722.09 1398.78,832.64 1593.78,832.64 1593.78,722.09
5VLOAD on Top Layer "5vload" (solid, pour order 11): 1580,290 1775,290 1775,90 1580,90
3V3LOAD on Top Layer "NONET_L-01_P-001" (solid, pour order 12): 1790,285 1970,285 1970,95 1790,95
no net on Top Solder "NONET_L-01_P-001" (solid): 500,1370 690,1370 690,1275 500,1275
no net on Top Solder "NONET_L-01_P-001" (solid): 494,832 494,722 694,722 694,832
no net on Top Solder "NONET_L-01_P-001" (solid): 1395,830 1590,830 1590,725 1395,725
no net on Top Solder "NONET_L-01_P-001" (solid): 1395,1375 1395,1270 1590,1270 1590,1375
GND on Bottom Layer "GNDBOT" (solid, pour order 1): 0,3690 3465,3690 3465,0 0,0

## Silkscreen, mask and mechanical layers (free items; w line width, h text height)
Top Overlay:
  lines w10: 1850,1202.5 1850,2102.5 2300,2102.5 2300,1202.5 1850,1202.5
  text "MAGNETORQUER Z" at 2310,2092.5 h60 r270
Bottom Overlay:
  lines w10: 157.48,2627.48 158.73,2628.73 161.23,2631.23 162.48,2632.48 192.48,2632.48 ; 742.48,1122.48 742.48,2632.48 2827.48,2632.48 2827.48,1122.48 742.48,1122.48

## Text inside footprints (layer, text, board x,y; h text height)
H1: Top Overlay "2" at 400,3310 h50; Top Overlay "1" at 400,3210 h50
H2A: Top Overlay "2" at 400,3510 h50; Top Overlay "1" at 400,3410 h50
J3: Top Overlay "2" at 1530,220 h50; Top Overlay "1" at 1530,120 h50; Top Overlay "15" at 2390,120 h50; Top Overlay "16" at 2390,220 h50